# EAGLE board reactor (EAGLE 6.4)
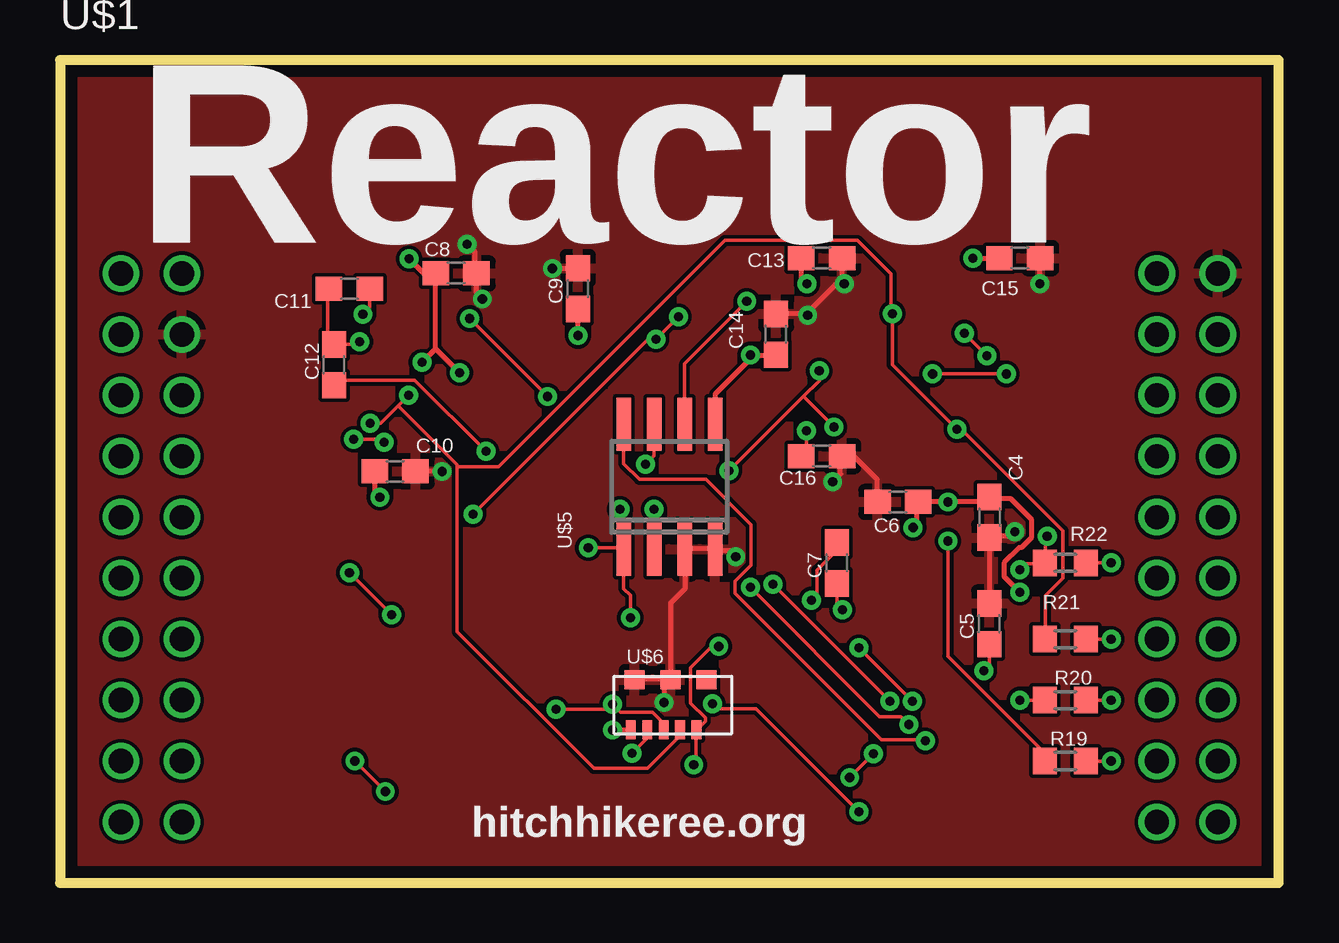
[diagram p0: board, top side]
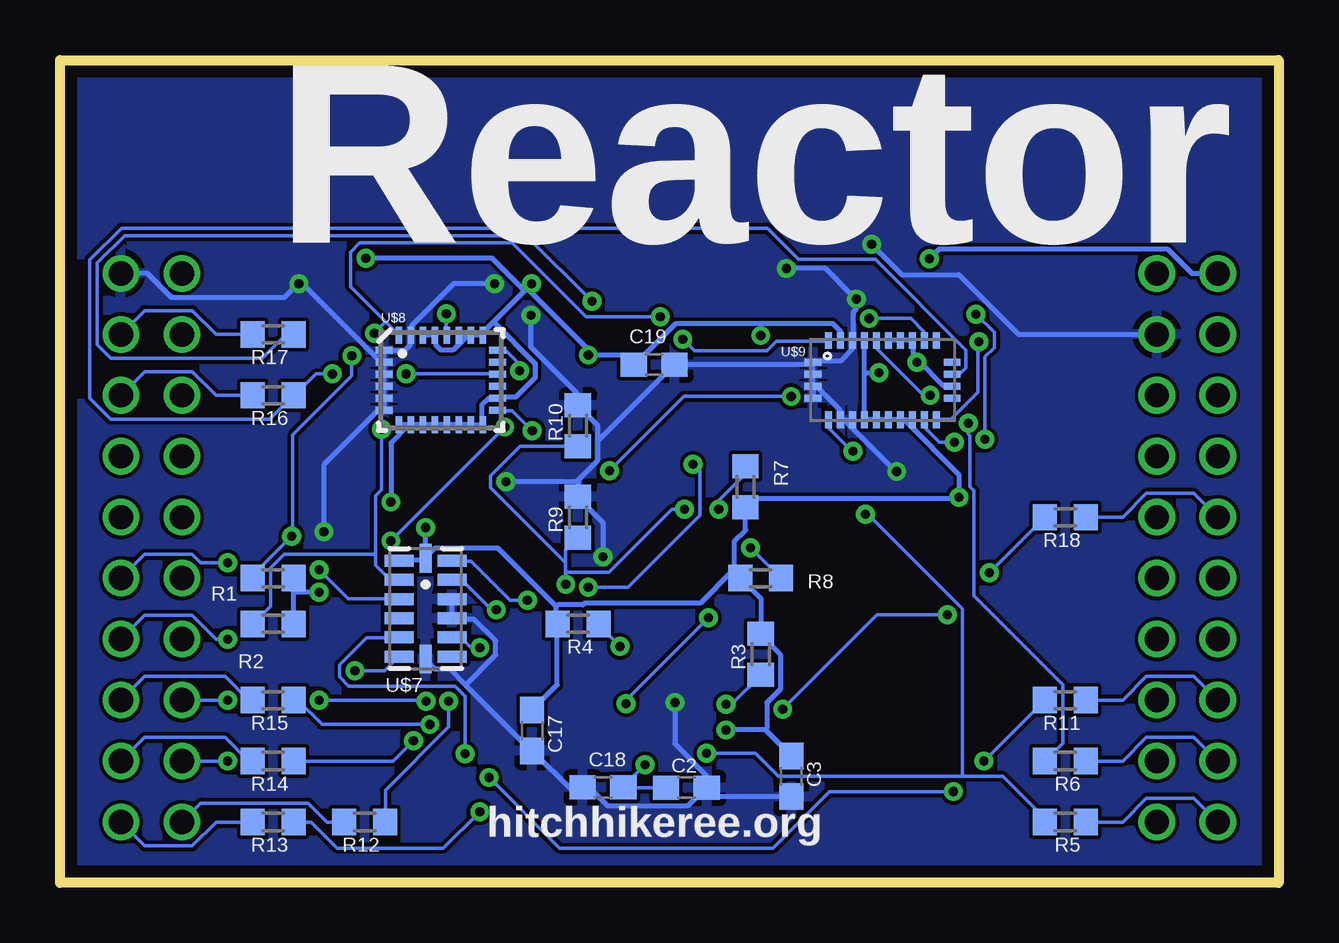
[diagram p1: board, bottom side, seen from below]

Size 50.8 x 34.29 mm. Coordinates in mm from the lower left corner, seen from the top.
Outline: 0,34.29 0,0 50.8,0 50.8,34.29 0,34.29
Copper layers (1*16): Top 0.035mm / dielectric 1.5mm / Bottom 0.035mm
Design rules "default *": minimum track width 6mil, minimum drill 15mil, track to track 6mil, track to pad 6mil, pad to pad 6mil, via to via 6mil, smd to smd 6mil, copper to edge 20mil, drill to drill 6mil, minimum pad ring 10mil, minimum via ring 8mil, stop-mask expansion 4mil, vias tented up to drill 25mil, thermal gap 10mil
Net classes: 0 default: width 0.152 mm, drill 0.381 mm, clearance 0.152 mm; 1 pwr: width 0.203 mm, drill 0.381 mm, clearance 0.152 mm

## Footprints (pad centres in the part's own frame; a part is rotated, then mirrored left to right if it is on the bottom)
C0603 = smd 1.1 x 1: 1 -0.85,0; 2 0.85,0
R0603 = smd 1 x 1.1: 1 -0.85,0; 2 0.85,0
LAUNCHPAD_BOOSTER_PACK = drill 1.016: 5V -20.32,8.89; AN@ -20.32,1.27; AN@1 -20.32,3.81; AN@3 -20.32,-1.27; AN@4 -20.32,-3.81; AN@5 -20.32,-6.35; AN@6 -20.32,-8.89; AN@7 -20.32,-11.43; AN@8 -20.32,-13.97; AN_IN -22.86,6.35; GND@1 -20.32,6.35; GND@2 22.86,8.89; GPIO@1 -22.86,-8.89; GPIO@2 -22.86,-11.43; GPIO@3 -22.86,-13.97; GPIO@4 22.86,-8.89; GPIO@5 22.86,-11.43; GPIO@6 22.86,-13.97; GPIO_INT@1 -22.86,-1.27; GPIO_INT@2 22.86,3.81; RESET 22.86,-1.27; SPIA_SCLK -22.86,-3.81; SPIB_SCLK -22.86,-6.35; SPIB_SIMO/I2C_SDA 22.86,-3.81; SPIB_SOMI/I2C_SCL 22.86,-6.35; TEST 22.86,1.27; TIM@1 20.32,8.89; TIM@2 20.32,6.35; TIM@3 20.32,3.81; TIM@4 20.32,1.27; TIM@5 20.32,-1.27; TIM@6 20.32,-3.81; TIM@7 20.32,-6.35; TIM@8 20.32,-8.89; TIM@9 20.32,-11.43; TIM@10 20.32,-13.97; TIM_OUT 22.86,6.35; UART_HW_RX -22.86,3.81; UART_HW_TX -22.86,1.27; VCC -22.86,8.89
SOIC8 = smd 0.6 x 2.2: 1 -1.905,-2.6; 2 -0.635,-2.6; 3 0.635,-2.6; 4 1.905,-2.6; 5 1.905,2.6; 6 0.635,2.6; 7 -0.635,2.6; 8 -1.905,2.6
VCNL3020 = smd 0.4 x 0.8: ANODE_E -1.61,-1.24; INT -0.24,-1.24; SCL 0.445,-1.24; SDA -0.925,-1.24; VDD 1.13,-1.24 | smd 0.83 x 0.8: CATHODE_E -1.45,0.85; CATHODE_PD 1.55,0.85; VSS 0.05,0.85
LGA14 = smd 0.5 x 1.2: 1 2,1.1; 2 1.2,1.1; 3 0.4,1.1; 4 -0.4,1.1; 5 -1.2,1.1; 6 -2,1.1; 8 -2,-1.1; 9 -1.2,-1.1; 10 -0.4,-1.1; 11 0.4,-1.1; 12 1.2,-1.1; 13 2,-1.1 | smd 1.2 x 0.5: 7 -2.1,0; 14 2.1,0
LGA28-4X5 = smd 0.7 x 0.29: 1 -2.362,1.25; 2 -2.362,0.75; 3 -2.362,0.25; 4 -2.362,-0.25; 5 -2.362,-0.75; 6 -2.362,-1.25; 15 2.362,-1.25; 16 2.362,-0.75; 17 2.362,-0.25; 18 2.362,0.25; 19 2.362,0.75; 20 2.362,1.25 | smd 0.29 x 0.7: 7 -1.75,-1.863; 8 -1.25,-1.863; 9 -0.75,-1.863; 10 -0.25,-1.863; 11 0.25,-1.863; 12 0.75,-1.863; 13 1.25,-1.863; 14 1.75,-1.863; 21 1.75,1.863; 22 1.25,1.863; 23 0.75,1.863; 24 0.25,1.863; 25 -0.25,1.863; 26 -0.75,1.863; 27 -1.25,1.863; 28 -1.75,1.863
LGA28 = smd 0.7 x 0.29: 1 -2.9,0.75; 2 -2.9,0.25; 3 -2.9,-0.25; 4 -2.9,-0.75; 15 2.9,-0.75; 16 2.9,-0.25; 17 2.9,0.25; 18 2.9,0.75 | smd 0.29 x 0.7: 5 -2.25,-1.65; 6 -1.75,-1.65; 7 -1.25,-1.65; 8 -0.75,-1.65; 9 -0.25,-1.65; 10 0.25,-1.65; 11 0.75,-1.65; 12 1.25,-1.65; 13 1.75,-1.65; 14 2.25,-1.65; 19 2.25,1.65; 20 1.75,1.65; 21 1.25,1.65; 22 0.75,1.65; 23 0.25,1.65; 24 -0.25,1.65; 25 -0.75,1.65; 26 -1.25,1.65; 27 -1.75,1.65; 28 -2.25,1.65

## Placement (x,y rotation side)
C2  0.1u  [C0603]  24.69,3.96 0 bottom
C3  0.1u  [C0603]  20.32,4.44 270 bottom
C4  10u  [C0603]  38.73,15.24 270 top
C5  4.7u  [C0603]  38.73,10.79 90 top
C6  0.1u  [C0603]  34.92,15.87 180 top
C7  0.22u  [C0603]  32.38,13.33 90 top
C8  10u  [C0603]  16.51,25.4 0 top
C9  0.1u  [C0603]  21.59,24.77 90 top
C10  0.1u  [C0603]  13.97,17.14 0 top
C11  0.22u  [C0603]  12.06,24.77 180 top
C12  4.7u  [C0603]  11.43,21.59 90 top
C13  10u  [C0603]  31.75,26.03 0 top
C14  0.1u  [C0603]  29.84,22.86 90 top
C15  0.1u  [C0603]  40,26.03 0 top
C16  10n  [C0603]  31.75,17.78 0 top
C17  0.1u  [C0603]  31.12,6.35 270 bottom
C18  10u  [C0603]  28.17,3.99 180 bottom
C19  0.1u  [C0603]  26.03,21.59 0 bottom
R1  5.6K, 5%  [R0603]  41.91,12.7 0 bottom
R2  5.6K, 5%  [R0603]  41.91,10.79 180 bottom
R3  10K  [R0603]  21.59,9.53 90 bottom
R4  33  [R0603]  29.21,10.79 180 bottom
R5  33  [R0603]  8.89,2.54 180 bottom
R6  33  [R0603]  8.89,5.08 180 bottom
R7  10K  [R0603]  22.23,16.51 90 bottom
R8  10K  [R0603]  21.59,12.7 0 bottom
R9  10K, DNI  [R0603]  29.21,15.24 90 bottom
R10  10K, DNI  [R0603]  29.21,19.05 90 bottom
R11  33  [R0603]  8.89,7.62 180 bottom
R12  33  [R0603]  38.1,2.54 180 bottom
R13  33  [R0603]  41.91,2.54 180 bottom
R14  33  [R0603]  41.91,5.08 180 bottom
R15  33  [R0603]  41.91,7.62 180 bottom
R16  33  [R0603]  41.91,20.32 180 bottom
R17  33  [R0603]  41.91,22.86 180 bottom
R18  33  [R0603]  8.89,15.24 180 bottom
R19  33  [R0603]  41.91,5.08 0 top
R20  33  [R0603]  41.91,7.62 0 top
R21  33  [R0603]  41.91,10.16 0 top
R22  33  [R0603]  41.91,13.33 0 top
U$1  [LAUNCHPAD_BOOSTER_PACK]  25.4,16.51 0 top
U$5  [SOIC8]  25.4,16.51 0 top
U$6  [VCNL3020]  25.4,7.62 0 top
U$7  [LGA14]  35.56,11.43 90 bottom
U$8  [LGA28-4X5]  34.92,20.95 0 bottom
U$9  [LGA28]  16.51,20.95 0 bottom

## Library data of the parts
C2 C3 C6 C9 C10 C14 C15 C19 = rcl; MPN: VJ0603V104ZXXCW1BC
C4 C8 C13 C17 C18 = rcl; MPN: LMK107BBJ106MALT
C5 C12 = rcl; MPN: GRM188F51A475ZE20J
C7 C11 = rcl; MPN: VJ0603V224MXJPW1BC
C16 = rcl; MPN: VJ0603Y103KXACW1BC
R1 R2 = rcl; MPN: RK73B1JTTDD562J
R3 R7-R10 = rcl; MPN: WR06X1002FTL
R4-R6 R11-R22 = rcl; MPN: CR0402-JW-330GLF
U$1 = Boards
U$5 = launchpad_bp; MPN: TCS32X0
U$6 = launchpad_bp; MPN: VCNL3020
U$7 = BoneCapeParts; MPN: LSM303DLHC
U$8 = BoneCapeParts; MPN: LSM330DLC
U$9 = BoneCapeParts; MPN: LSM333D

## Nets
+3V3 [pwr]: C3.1 C4.1 C6.1 C8.1 C9.1 C10.1 C13.1 C14.1 C15.1 C17.1 C19.1 R1.2 R2.1 R3.2 R4.2 R7.1 R8.1 U$1.VCC U$5.5 U$6.ANODE_E U$7.1 U$7.14 U$8.7 U$8.8 U$8.9 U$8.10 U$8.11 U$8.12 U$8.13 U$8.14 U$8.16 U$8.21 U$8.22 U$8.23 U$8.25 U$8.26 U$9.8 U$9.9 U$9.10 U$9.11 U$9.12 U$9.16 U$9.21 U$9.22 U$9.23 U$9.25 U$9.27
+5V: U$1.5V
DRDY: R20.1 U$7.9
GND [pwr]: C2.2 C3.2 C4.2 C5.2 C6.2 C8.2 C9.2 C10.2 C13.2 C14.2 C15.2 C16.2 C17.2 C18.2 C19.2 R9.2 R10.2 U$1.GND@1 U$1.GND@2 U$5.3 U$5.4 U$6.CATHODE_E U$6.VSS U$7.7 U$7.10 U$7.11 U$8.1 U$8.2 U$8.3 U$8.4 U$8.5 U$8.6 U$8.27 U$9.1 U$9.2 U$9.3 U$9.4 U$9.6 U$9.7 U$9.26
I2C_SCL: R2.2 R6.2 R21.1 U$6.SCL U$7.2 U$8.24 U$9.24
I2C_SDA: R1.1 R5.2 R22.1 U$6.SDA U$7.3 U$8.28 U$9.28
INT1: R11.2 U$7.5
INT1_A/M: R19.1 U$8.20 U$9.20
INT1_G: R16.1 U$8.18 U$9.17
INT_IR: R3.1 R18.2 U$6.INT
N$1: C2.1 C18.1 R4.1 U$6.VDD
N$2: R18.1 U$1.GPIO_INT@1
N$3: R11.1 U$1.GPIO@1
N$4: R19.2 U$1.TIM@9
N$5: R20.2 U$1.TIM@8
N$6: R6.1 U$1.GPIO@2
N$7: R5.1 U$1.GPIO@3
N$8: R21.2 U$1.SPIB_SOMI/I2C_SCL
N$9: R22.2 U$1.SPIB_SIMO/I2C_SDA
N$10: R12.2 U$1.TIM@10
N$12: R15.2 U$1.GPIO@4
N$13: R14.2 U$1.GPIO@5
N$14: R13.2 U$1.GPIO@6
N$18: R17.2 U$1.TIM_OUT
N$19: R16.2 U$1.GPIO_INT@2
N$45: C7.1 U$7.12
N$46: C7.2 U$7.13
N$47: C5.1 U$7.6
N$48: C16.1 U$8.15
N$50: C11.1 U$9.13
N$51: C11.2 C12.2 U$9.14
N$52: C12.1 U$9.5
RGB_OUT: R17.1 U$5.6
RGB_S0: R7.2 R8.2 R13.1 U$5.1
RGB_S1: R9.1 R10.1 R12.1 U$5.2
RGB_S2: R15.1 U$5.7
RGB_S3: R14.1 U$5.8

## Tracks (layer width: path | path; a pad name or v marks a point on that pad's centre or on a via)
+3V3  (via drill 0.38)
  Top 0.203: C14.1 v28.78,22 28.85,21.92 27.3,20.37 U$5.5 | v21.59,22.81 C9.1 | v40,12.12 39.34,12.78 39.34,13.33 39.98,13.97 40.08,13.97 40.49,14.38 40.49,15.16 39.62,16.03 38.81,16.03 C4.1 38.73,16.08 38.53,15.87 v37.01,15.87 C6.1 35.71,15.8 35.71,14.96 v35.56,14.81 | v31.14,24.97 30.91,25.2 30.91,26.03 C13.1 | v38.05,26.03 C15.1 | 15.65,22.25 C8.1 15.57,24.99 v14.55,26.01 | v15.09,21.69 15.65,22.25 | v13.34,16.08 13.13,16.28 13.13,17.14 C10.1 | v23.04,6.38 U$6.ANODE_E | v16.66,21.26 15.72,22.2 15.65,22.25
  Bottom 0.203: 21.59,23.32 25.12,23.32 26.85,21.59 C19.1 26.57,22 v28.78,22 28.83,22.07 28.83,22.28 31.27,24.71 v31.14,24.97 31.43,24.68 | 21.59,23.32 18.59,23.32 18.26,22.99 U$9.27 | 21.59,23.32 v21.59,22.81 | 41.07,12.12 R1.2 | 41.07,12.12 R2.1 | v40,12.12 41.07,12.12 | 36.32,19.1 36.27,19.1 U$8.8 35.76,19.1 U$8.9 35.66,19.1 35.28,19.1 U$8.10 35.15,19.1 34.77,19.1 U$8.11 34.27,19.1 U$8.12 34.16,19.1 33.76,19.1 U$8.13 33.66,19.1 33.2,19.1 U$8.14 33.2,19.2 33.2,19.94 32.94,20.19 32.56,20.19 U$8.16 32.46,20.24 31.8,20.24 30.99,21.06 30.99,21.64 32.73,23.38 | 36.32,19.1 36.65,19.1 U$8.7 | U$8.26 35.66,22.84 35.18,22.84 U$8.25 35.13,22.73 35.13,22.4 34.92,22.2 34.42,22.2 33.86,22.76 33.86,22.84 | 33.86,22.84 33.76,22.84 U$8.22 33.66,22.84 33.2,22.84 U$8.21 33.17,22.94 32.73,23.38 | 33.86,22.84 34.16,22.84 U$8.23 | 32.73,23.38 31.43,24.68 | v38.05,26.03 32.79,26.03 31.43,24.68 | v37.01,15.87 37.01,18.34 36.32,19.02 36.32,19.1 | 15.02,21.76 15.24,21.97 15.24,22.58 U$9.21 15.34,22.61 U$9.22 15.85,22.61 U$9.23 | 15.02,21.76 13.99,20.73 13.61,20.73 U$9.16 | v15.09,21.69 15.02,21.76 | U$1.VCC 3.63,25.4 4.65,26.42 14.15,26.42 v14.55,26.01 | U$7.1 36.65,13.44 35.64,13.44 35.56,13.51 U$7.14 | C17.1 30.07,8.26 R4.2 30.12,10.87 30.12,11.53 | 30.12,11.53 32.54,13.94 35.18,13.94 35.51,13.61 U$7.14 | 15.55,19.3 U$9.11 15.85,19.3 U$9.10 16.36,19.3 16.74,19.3 U$9.9 16.84,19.3 U$9.8 17.27,19.41 17.27,21.26 | 15.55,19.3 U$9.12 | 17.27,21.26 17.27,22.58 U$9.25 | 15.55,19.3 15.55,19.23 13.34,17.02 v13.34,16.08 13.41,16.03 21.84,16.03 22.15,15.72 R7.1 22.23,14.71 22.68,14.25 22.68,12.95 22.5,12.78 R8.1
  Bottom 0.203: 21.39,6.38 v23.04,6.38 | 21.39,6.38 20.32,5.31 C3.1 | R8.1 21.59,11.86 R3.2 21.54,10.29 20.78,9.53 20.78,8.08 21.34,7.52 21.34,6.45 21.39,6.38 | 30.12,11.53 30.05,11.58 29.01,11.58 28.93,11.66 24.1,11.66 22.76,13.01 R8.1 | 17.27,21.26 v16.66,21.26 | U$7.14 v35.56,14.81
DRDY  (via drill 0.38)
  Top 0.152: v40,7.62 R20.1 | v33.3,9.8 v35.53,7.57
  Bottom 0.152: v40,7.62 35.59,7.62 v35.53,7.57 | v33.3,9.8 33.66,9.8 34.06,10.21 34.44,10.21 U$7.9
GND  (via drill 0.38)
  Top 0.203: C5.2 C4.2 38.81,14.45 39.62,14.45 v39.8,14.63 | v40.84,24.97 40.84,26.03 C15.2 | U$6.CATHODE_E 25.42,8.48 U$6.VSS | U$6.VSS | 31.12,23.72 29.84,23.72 C14.2 | 32.52,25.13 32.59,25.2 32.59,26.03 C13.2 | 32.52,25.13 31.12,23.72 | C6.2 34.06,15.87 34.06,16.81 33.1,17.78 C16.2 32.54,17.7 32.54,17.04 v32.21,16.71 | v28.17,13.59 27.91,13.84 27.38,13.84 U$5.4 27.3,13.92 26.03,13.92 U$5.3 26.06,13.82 26.06,12.27 25.45,11.66 25.45,8.58 U$6.VSS | v31.17,23.65 31.12,23.72 | v15.93,17.14 C10.2 | v17.6,24.33 17.37,24.56 17.37,25.4 C8.2 17.3,25.48 17.3,26.29 v16.97,26.62 | v20.52,25.6 21.59,25.6 C9.2 | 32.52,25.13 v32.69,24.97 | v25.17,7.52 25.17,8.41 U$6.VSS
  Bottom 0.203: 37.29,19.86 37.29,20.19 U$8.5 37.29,20.3 U$8.4 37.29,20.8 37.29,21.18 U$8.3 37.29,21.28 37.29,21.69 U$8.2 | 37.29,19.86 U$8.6 | U$8.2 37.29,21.79 U$8.1 37.19,22.2 36.42,22.2 36.2,22.43 36.2,22.81 U$8.27 36.14,22.91 36.14,23.22 34.39,24.97 v32.69,24.97 | U$8.2 37.39,21.67 40.69,24.97 v40.84,24.97 40.92,24.92 41.45,24.38 46.15,24.38 47.17,25.4 U$1.GND@2 | v39.8,14.63 39.8,17.42 37.36,19.86 37.29,19.86 | U$7.11 34.47,11.81 34.47,11.05 U$7.10 34.37,11 33.55,11 32.64,10.08 32.64,9.5 33.9,8.24 | 33.9,8.24 34.57,8.92 35.18,8.92 35.56,9.3 U$7.7 | 33.9,8.24 31.17,5.51 C17.2 31.04,5.44 29.59,3.99 C18.2 28.93,3.94 28.7,3.94 27.96,3.2 24.64,3.2 23.93,3.91 C2.2 | 29.21,16.71 29.21,16.79 28.4,17.6 28.4,18.47 | 29.21,16.71 R9.2 29.16,16 28.17,15.01 v28.17,13.59 | 28.4,18.47 28.4,19.07 29.21,19.89 R10.2 29.26,19.99 29.26,20.42 31.17,22.33 v31.17,23.65 | 28.4,18.47 28.32,18.47 25.2,21.59 C19.2 19.48,21.59 U$9.1 | 29.21,16.71 v32.21,16.71 | 18.06,19.3 18.24,19.3 U$9.6 18.29,19.41 18.29,19.71 19.33,20.75 U$9.3 | 18.06,19.3 17.78,19.3 U$9.7 | U$9.4 19.41,20.22 U$9.3 | U$9.3 19.41,20.8 19.41,21.18 U$9.2 19.41,21.28 19.41,21.69 U$9.1 | U$9.1 19.33,21.77 18.24,21.77 17.78,22.23 17.78,22.58 U$9.26 17.73,22.71 17.73,23.8 17.6,23.93 v17.6,24.33 17.68,24.38 18.9,25.6 v20.52,25.6 | v15.93,17.14 15.98,17.14 18.06,19.23 18.06,19.3 | U$1.GND@1 10.85,22.86 13.34,25.35 15.7,25.35 v16.97,26.62 | C3.2 20.32,3.61 23.47,3.61 C2.2 | v25.17,7.52 25.17,5.79 23.85,4.47 23.85,4.06 C2.2
  pour Bottom: -24.26,48.54 76.02,48.54 76.02,-7.95 -24.87,-7.95 -24.87,48.23
  pour Top: -24.77,49.45 75.72,49.45 75.72,-7.85 -25.27,-7.85 -25.27,49.56
I2C_SCL  (via drill 0.38)
  Top 0.152: 14.1,19.89 13.36,19.15 v12.93,19.15 | 14.1,19.89 v14.53,20.32 | R21.1 41.07,11.96 41.81,12.7 41.81,14.68 37.64,18.85 37.44,18.85 v37.39,18.9 34.7,21.59 v34.7,23.72 34.65,23.77 34.65,25.38 33.25,26.77 27.71,26.77 18.29,17.35 16.56,17.35 | 16.56,17.35 16.56,17.42 14.1,19.89 | 16.56,17.35 16.56,10.46 22.25,4.77 24.49,4.77 25.83,6.12 25.83,6.38 U$6.SCL
  Bottom 0.152: v14.53,20.32 14.81,20.32 16.74,22.25 16.74,22.58 U$9.24 | v12.93,19.15 12.93,18.69 12.88,18.64 12.88,16.51 12.7,16.33 12.7,11.96 8.99,8.26 8.99,5.82 9.73,5.08 R6.2 | v34.7,23.72 34.7,22.84 U$8.24 | v37.39,18.9 37.39,16.38 37.64,16.13 37.64,13.69 | 37.64,13.69 37.64,13.23 37.06,12.65 36.68,12.65 U$7.2 | 37.64,13.69 41.45,13.69 42.01,13.13 42.01,11.53 42.7,10.85 R2.2
I2C_SDA  (via drill 0.38)
  Top 0.152: v23.85,5.41 24.46,6.02 24.46,6.38 U$6.SDA | v41.15,14.45 41.07,14.38 R22.1 41,13.31 40.26,13.31 v40,13.06 | v25.78,23.6 v24.84,22.66 24.79,22.61 24.46,22.61 v17.22,15.37 | v37.69,22.91 v38.63,21.97
  Bottom 0.152: v23.85,5.41 21.82,5.41 20.85,4.44 13.18,4.44 | 13.18,4.44 11.51,4.44 9.75,2.69 R5.2 | R1.1 42.75,12.85 v41.15,14.45 41.1,14.5 41.1,18.67 38.63,21.13 v38.63,21.97 | v40,13.06 38.79,11.84 36.68,11.84 U$7.3 | v24.84,22.66 24.36,22.17 21.34,22.17 20.93,22.58 18.77,22.58 U$9.28 | v25.78,23.6 28.88,23.6 31.95,26.67 38.3,26.67 38.68,26.29 38.68,24.84 37.22,23.38 | 37.22,23.38 36.68,22.84 U$8.28 | 37.22,23.38 v37.69,22.91 | 13.18,4.44 13.18,11.43 17.12,15.37 v17.22,15.37
INT1  (via drill 0.38)
  Top 0.152: v13.56,3.81 v12.29,5.08 | v33.91,5.38 v32.92,4.39
  Bottom 0.152: v12.29,5.08 R11.2 | v13.56,3.81 18.72,3.81 21.08,1.45 29.97,1.45 v32.92,4.39 | v33.91,5.38 33.91,7.77 34.34,8.2 38.76,8.2 39.14,8.58 39.14,9.09 38.02,10.21 36.68,10.21 U$7.5
INT1_A/M  (via drill 0.38)
  Top 0.152: v20.32,20.27 v17.07,23.52 | 30.99,20.27 31.65,20.93 v31.65,21.34 | 30.99,20.27 v27.89,17.17 | v37.01,14.25 37.01,9.45 41.05,5.41 41.05,5.08 R19.1 | 30.99,20.27 v32.26,19
  Bottom 0.152: v17.07,23.52 15.34,23.52 14.78,22.96 14.78,22.61 U$9.20 | v20.32,20.27 24.79,20.27 v27.89,17.17 | v31.65,21.34 31.65,21.62 32.23,22.2 32.54,22.2 U$8.20 | v32.26,19 v37.01,14.25
INT1_G  (via drill 0.38)
  Top 0.152: v39.45,21.21 v36.37,21.21
  Bottom 0.152: U$9.17 13.59,21.21 13.28,21.21 13.03,21.46 13.03,22.2 16.81,25.98 20.02,25.98 21.31,27.28 48.23,27.28 49.55,25.96 49.55,20.19 48.69,19.33 42.06,19.33 R16.1 41,20.34 40.13,21.21 v39.45,21.21 | v36.37,21.21 U$8.18
INT_IR  (via drill 0.38)
  Top 0.152: U$6.INT 25.15,6.4 25.15,6.65 24.69,7.11 23.37,7.11 v23.04,7.44 22.84,7.24 v20.68,7.24 | v13.82,11.18 v12.06,12.93
  Bottom 0.152: v23.04,7.44 22.81,7.44 21.59,8.66 R3.1 | v12.06,12.93 R18.2 | v13.82,11.18 16.74,11.18 v20.68,7.24
N$1  (via drill 0.38)
  Top 0.152: v26.42,4.93 26.52,5.03 26.52,6.38 U$6.VDD 26.59,6.43 26.9,6.73 26.9,6.88 26.29,7.49 26.29,8.97 27.18,9.85 v27.46,9.85
  Bottom 0.152: v26.42,4.93 27.3,4.04 C18.1 27.25,3.96 C2.1 | v27.46,9.85 28.35,10.74 R4.1
N$2
  Bottom 0.152: R18.1 6.5,15.24 5.51,16.23 3.53,16.23 U$1.GPIO_INT@1
N$3
  Bottom 0.152: R11.1 6.5,7.62 5.51,8.61 3.53,8.61 U$1.GPIO@1
N$4  (via drill 0.38)
  Top 0.152: v43.81,5.08 R19.2
  Bottom 0.152: U$1.TIM@9 v43.81,5.08
N$5  (via drill 0.38)
  Top 0.152: v43.81,7.62 R20.2
  Bottom 0.152: U$1.TIM@8 v43.81,7.62
N$6
  Bottom 0.152: R6.1 6.5,5.08 5.51,6.07 3.53,6.07 U$1.GPIO@2
N$7
  Bottom 0.152: R5.1 6.5,2.54 5.51,3.53 3.53,3.53 U$1.GPIO@3
N$8  (via drill 0.38)
  Top 0.152: v43.81,10.16 R21.2
  Bottom 0.152: v43.81,10.16 44.3,10.16 45.29,11.15 47.27,11.15 U$1.SPIB_SOMI/I2C_SCL
N$9  (via drill 0.38)
  Top 0.152: v43.81,13.33 R22.2
  Bottom 0.152: v43.81,13.33 44.93,13.33 45.29,13.69 47.27,13.69 U$1.SPIB_SIMO/I2C_SDA
N$10
  Bottom 0.152: R12.2 39.67,2.54 40.46,3.33 44.93,3.33 U$1.TIM@10
N$12
  Bottom 0.152: R15.2 42.93,7.62 43.92,8.61 47.27,8.61 U$1.GPIO@4
N$13
  Bottom 0.152: R14.2 42.93,5.08 43.92,6.07 47.27,6.07 U$1.GPIO@5
N$14
  Bottom 0.152: R13.2 44.3,2.54 45.29,1.55 47.27,1.55 U$1.GPIO@6
N$18
  Bottom 0.152: R17.2 44.3,22.86 45.29,23.85 47.27,23.85 U$1.TIM_OUT
N$19
  Bottom 0.152: R16.2 44.3,20.32 45.29,21.31 47.27,21.31 U$1.GPIO_INT@2
N$45  (via drill 0.38)
  Top 0.152: C7.1 32.38,11.61 v32.61,11.38
  Bottom 0.152: v32.61,11.38 32.82,11.38 34.06,12.62 34.44,12.62 U$7.12
N$46  (via drill 0.38)
  Top 0.152: C7.2 32.38,13.87 31.55,13.03 31.55,12.01 v31.32,11.79
  Bottom 0.152: v31.32,11.79 32.03,11.79 33.66,13.41 34.44,13.41 U$7.13
N$47  (via drill 0.38)
  Top 0.152: C5.1 38.73,9.07 v38.51,8.84
  Bottom 0.152: v38.51,8.84 37.26,8.84 36.68,9.42 U$7.6
N$48  (via drill 0.38)
  Top 0.152: v31.12,18.85 31.12,17.98 30.91,17.78 C16.1
  Bottom 0.152: v31.12,18.85 31.95,19.69 32.54,19.69 U$8.15
N$50  (via drill 0.38)
  Top 0.152: v13.51,18.36 13.39,18.49 v12.24,18.49 | v12.62,23.7 12.9,23.98 12.9,24.77 C11.1
  Bottom 0.152: v13.51,18.36 14.15,18.36 14.76,18.97 U$9.13 | v12.24,18.49 12.24,21.92 11.86,22.3 11.86,22.94 v12.62,23.7
N$51  (via drill 0.38)
  Top 0.152: v12.5,22.55 12.39,22.45 C12.2 11.38,22.5 11.15,22.66 11.15,24.77 C11.2
  Bottom 0.152: v12.5,22.55 12.55,22.5 12.55,20.45 13.66,19.33 14.25,19.33 U$9.14
N$52  (via drill 0.38)
  Top 0.152: v17.76,17.98 14.78,20.95 11.63,20.95 11.43,20.75 C12.1
  Bottom 0.152: v17.76,17.98 17.78,17.98 18.74,18.95 U$9.5
RGB_OUT  (via drill 0.38)
  Top 0.152: v28.63,24.23 26.03,21.64 U$5.6
  Bottom 0.152: R17.1 41.38,22.86 42.37,21.87 48.69,21.87 49.25,22.43 49.25,25.83 48.11,26.97 31.37,26.97 v28.63,24.23
RGB_S0  (via drill 0.38)
  Top 0.152: v22.02,13.97 23.44,13.97 23.49,13.92 U$5.1 | v23.34,15.57 23.49,15.42 U$5.1 | v33.3,2.97 29.01,7.26 27.41,7.26 v27.2,7.47 | v23.77,11.05 23.77,11.99 23.49,12.27 U$5.1
  Bottom 0.152: v22.02,13.97 20.75,12.7 R8.2 | R7.2 22.23,17.04 23.34,15.93 v23.34,15.57 | R13.1 40.33,2.54 39.24,1.45 34.82,1.45 v33.3,2.97 | v27.2,7.47 27.2,7.62 v23.77,11.05
RGB_S1  (via drill 0.38)
  Top 0.152: v29.72,12.45 v34.59,7.57 | v24.77,15.57 U$5.2
  Bottom 0.152: v34.59,7.57 34.59,6.5 37.24,3.86 37.24,2.54 R12.1 | 29.72,13.39 29.72,13.87 R9.1 | 29.72,13.39 29.72,12.95 | 29.72,12.95 v29.72,12.45 | R10.1 31.62,18.19 32.84,16.97 32.84,16.46 29.77,13.39 29.72,13.39 | v24.77,15.57 25.3,15.57 27.91,12.95 29.72,12.95
RGB_S2  (via drill 0.38)
  Top 0.152: v35.38,6.6 35.05,6.93 34.16,6.93 v28.78,12.32 | v24.41,17.45 24.77,17.8 U$5.7
  Bottom 0.152: R15.1 40.89,7.62 39.88,6.6 v35.38,6.6 | v28.78,12.32 27.13,12.32 24.13,15.32 24.13,17.17 v24.41,17.45
RGB_S3  (via drill 0.38)
  Top 0.152: v36.07,5.92 36.02,5.97 34.24,5.97 28.14,12.06 28.14,12.57 28.8,13.23 28.8,14.94 26.92,16.81 24.16,16.81 23.49,17.48 U$5.8
  Bottom 0.152: R14.1 36.91,5.08 v36.07,5.92

## Text on the board
tPlace: Reactor | hitchhikeree.org
bPlace: Reactor | hitchhikeree.org